# Altium PCB LM2596-12V.PcbDoc
Units mm, origin at the board's own origin, x right, y up, seen from the top; angles counter-clockwise.
Board outline 61.2 x 24 mm, 2 copper layers (Top Layer, Bottom Layer); 12 components, 5 nets, 40 pads, 39 vias.
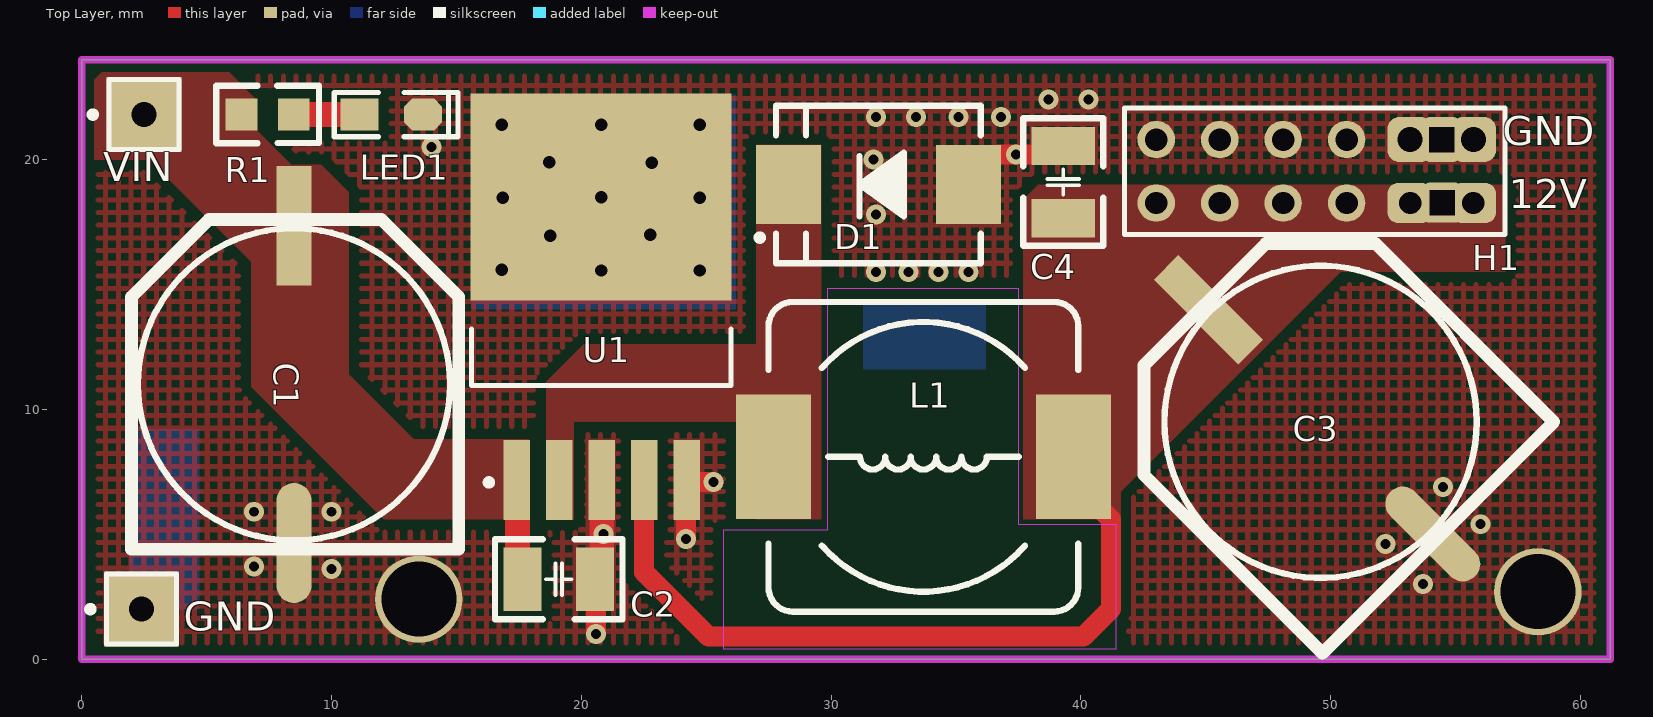
[diagram p0: Top Layer view]
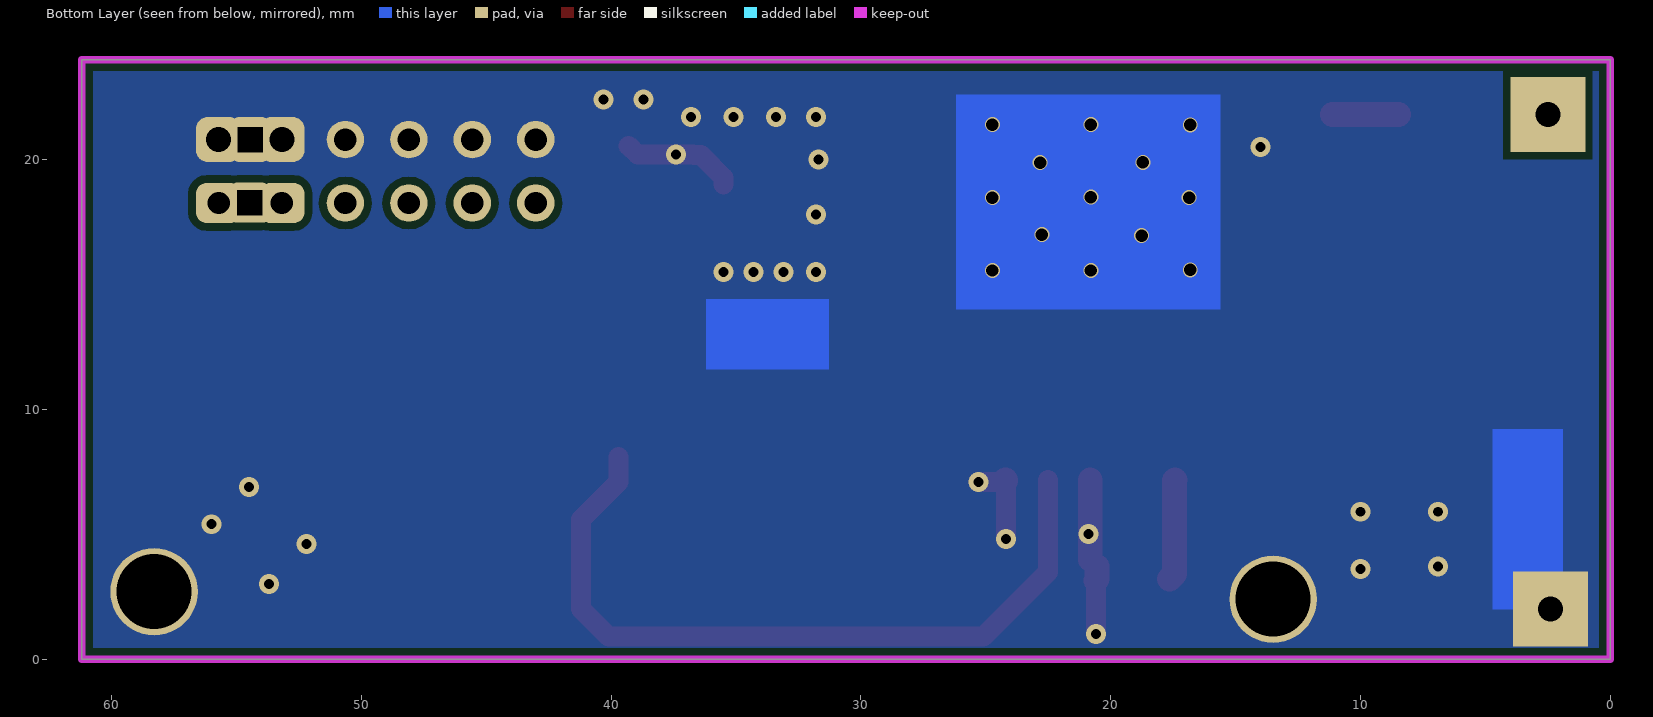
[diagram p1: Bottom Layer view, seen from below]
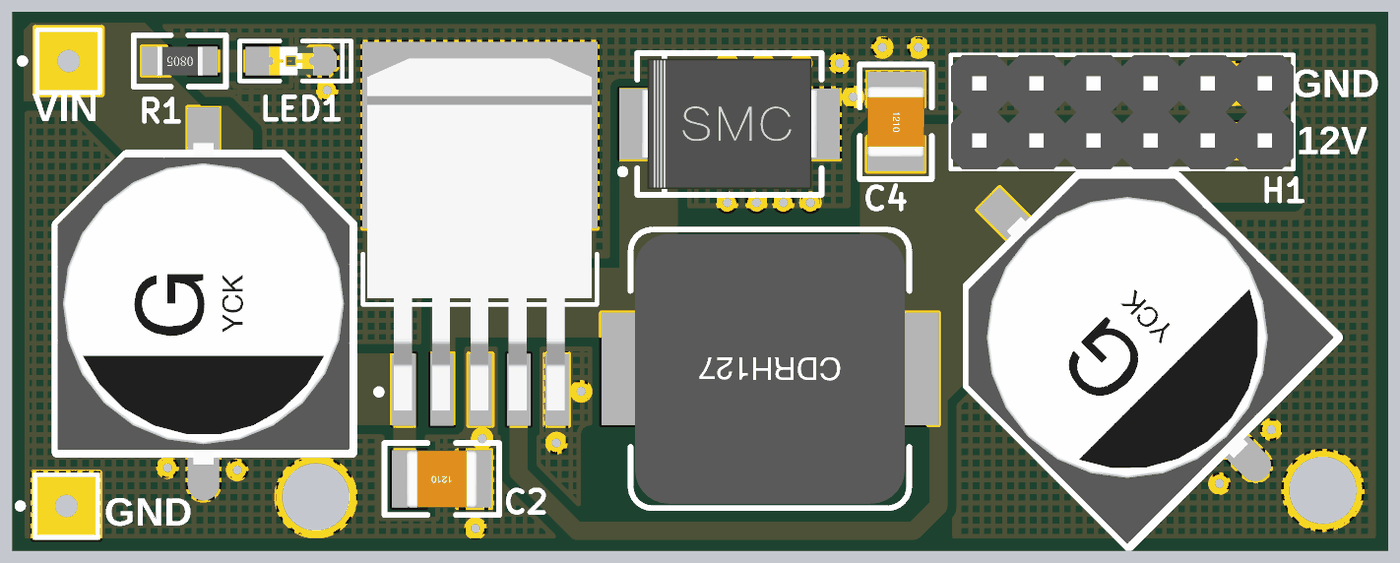
[diagram p2: 3D render of the assembled board from above, using the file's embedded part models]

## Layer stack, top to bottom
Top Solder: solder mask 0.0102, Solder Resist, Dk 3.5
Top Layer: signal copper 0.0356
Dielectric 1: dielectric 0.32, FR-4, Dk 4.8
Bottom Layer: signal copper 0.0356
Bottom Solder: solder mask 0.0102, Solder Resist, Dk 3.5

## Board outline
0,0 61.2,0 61.2,24 0,24

## Design rules (kind name [scope] priority, off if disabled: settings)
Clearance Clearance_1 [InNet('GND') And OnLayer('Bottom Layer')] p1: gap=0.3 ignorepadtopadclearanceinfootprint=TRUE
Clearance [InNet('GND') And OnLayer('Top Layer')] p2: gap=0.4 ignorepadtopadclearanceinfootprint=TRUE
PlaneConnect [All] p1: planeconnectstyle=Relief reliefexpansion=0.508 reliefentries=4 reliefconductorwidth=0.254 reliefairgap=0.3
PolygonConnect [All] p1: connectstyle=Direct reliefconductorwidth=0.3 reliefentries=4 polygonreliefangle="90 Angle" airgapwidth=0.3
RoutingVias [All] p1: holewidth=0.711 width=1.27 viastyle="Through Hole" minholewidth=0.4 minwidth=0.5 maxholewidth=1 maxwidth=2
SolderMaskExpansion [All] p1: expansion=0.102 istentingtop=FALSE
Width [All] p1: maxlimit=3 minlimit=0.3 preferedwidth=0.8
29 further rules are at their usual default settings.

## Components (designator, comment, footprint, x,y, rotation, side; value= is the part's Value field where it differs from the comment)
C1 "470uF" "CM G(12.5*13.5)" 8.5,11 r90 top
C2 "100nF" "C 1210_L" 19.1,3.2 r180 top
C3 "470uF" "CM G(12.5*13.5)" 49.6,9.5 r135 top
C4 "100nF" "C 1210_L" 39.3,19.1 r270 top
D1 "SS56 SMC" SMC 31.9,19 r180 top
GND "HDR-M-2.54_1x1" PIN1 2.4,2 r90 top (schematic designator J2)
H1 "PZ254V-12-12P" HDR2X6 55.72,20.8 r180 top
L1 "68uH" CDRH127 33.7,8.1 r180 top
LED1 "Red" "LED 0805R" 12.4,21.8 r0 top
R1 "2K" R0805 8.49,21.805 r180 top
U1 "LM2596S-12/TR_C462059" TO263-5 20.419,12.383 r270 top
VIN "HDR-M-2.54_1x1" PIN1 2.5,21.8 r90 top (schematic designator J1)

## Footprints (in the part's own frame and the unit in brackets; to place one, negate y for a bottom-side part, rotate by r counter-clockwise, add the part's x,y. Pads: shape width x height; smd on the part's side, far side on the other; paste and mask are expansions set on the pad)
"C 1210_L" [mm] "无极性贴片电容"
  rect 1.524x2.54 smd: 1(-1.45,0) 2(1.45,0)
  silkscreen extent -2.55,-1.6 2.55,1.6, body extent -1.6,-1.29 1.6,1.29, height 1.54
CDRH127 [mm] "12*12*8mm（长宽高）"
  rect 3x5 smd: 1(-6,0) 2(6,0)
  silkscreen extent -6.2,-6.2 6.2,6.2, body extent -6,-6 6,6, height 7.8
"CM G(12.5*13.5)" [mm] "贴片电解电容，直径12.5mm，高13.5mm"
  rect 4.8x1.4 smd: 1(6.35,0)
  oval 4.8x1.4 smd: 2(-6.35,0)
  silkscreen extent -6.6,-6.6 6.6,6.5, body extent -7.15,-6.5 7.15,6.5, height 13.5
HDR2X6 [mm] "Connector; Header; 6x2 Position"
  rrect50% 1.8x1.8 hole 1: 1(0,0) 3(2.54,0)
  rrect50% 1.8x1.6 hole 0.9: 2(0,2.54) 4(2.54,2.54)
  round 1.5 hole 0.9: 5(5.08,0) 6(5.08,2.54) 7(7.62,0) 8(7.62,2.54) 9(10.16,0) 10(10.16,2.54) 11(12.7,0) 12(12.7,2.54)
  silkscreen extent -1.27,-1.27 13.97,3.81, body extent -1.27,-1.27 13.97,3.81, height 8.54
"LED 0805R" [mil] "红色0805LED                                       淘宝ID:黄晶宝石"
  rect 60x50 smd: 1(-50,0)
  oct 60x50 smd: 2(50,0)
  silkscreen extent -90,-35 105,35, body extent -39,-25 39,25, height 32
PIN1 [mm] "Connector; Plug"
  rect 3x3 hole 1: 1(0,0)
  silkscreen extent -1.4,-1.4 1.4,2.17
R0805 [mm] "1/8W"
  rect 1.27x1.27 smd: 1(0,0) 2(2.09,0.005)
  silkscreen extent -1.01,-1.14 3.1,1.15, body extent 0.04,-0.62 2.04,0.64, height 0.55
SMC [mm] "7.1x5.9*2.3mm（长宽高，不包括引脚）"
  rect 2.6x3.15 smd: 1(-3.6,0) 2(3.6,0)
  silkscreen extent -4.1,-3.15 4.87,3.15, body extent -3.95,-2.9 3.95,2.9, height 2.45
TO263-5 [mm]
  rect 3.2x1.05 smd: 1(5.207,-2.997) 2(5.207,-1.297) 3(5.207,0.403) 4(5.207,2.103) 5(5.207,3.803)
  rect 8.3x10.45 smd: 6(-6.117,0.381)
  silkscreen extent -0.83,-4.82 5.43,5.58, body extent -9.54,-4.64 6.13,5.36, height 4.78

## Part data
C1 C3: BOM_Manufacturer=LELON, BOM_Manufacturer Part=VEJ471M1HTR-1316, BOM_Supplier=LCSC, BOM_Supplier Part=C108926, Contributor=LCSC, nameAlias=Capacitance, spicePre=C, spiceSymbolName=VEJ471M1HTR-1316
C2 C4: BOM_Manufacturer=HEC, BOM_Manufacturer Part=C1210X104K251T, BOM_Supplier=LCSC, BOM_Supplier Part=C106103, nameAlias=Capacitance, spicePre=C, spiceSymbolName=C1210X104K251T
D1: BOM_LCSC Assembly=Yes, BOM_Manufacturer=MDD, BOM_Manufacturer Part="SS56 SMC", BOM_Supplier=LCSC, BOM_Supplier Part=C24138, image=//image.lceda.cn/szlcsc/C24138.jpg, SMT Type=Extend, spicePre=D, spiceSymbolName="SS56 SMC"
H1: BOM_JLCPCB Part Class="Extended Part", BOM_Manufacturer=XFCN, BOM_Manufacturer Part=PZ254V-12-12P, BOM_Supplier=LCSC, BOM_Supplier Part=C492423, Contributor=LCSC, spicePre=H, spiceSymbolName=PZ254V-12-12P
L1: BOM_Manufacturer=YJYCOIN, BOM_Supplier=LCSC, BOM_Supplier Part=C497902, Contributor=LCSC, nameAlias=Inductance, spicePre=L, spiceSymbolName=MS1360-680M
LED1: library part 17-21SURC/S530-A3/TR8, BOM_JLCPCB Part Class="Extended Part", BOM_Manufacturer=EVERLIGHT, BOM_Manufacturer Part=17-21SURC/S530-A3/TR8, BOM_Supplier=LCSC, BOM_Supplier Part=C72037, spicePre=L, spiceSymbolName=17-21SURC/S530-A3/TR8
R1: BOM_JLCPCB Part Class="Extended Part", BOM_Manufacturer=UniOhm, BOM_Manufacturer Part=0805W8J0202T5E, BOM_Supplier=LCSC, BOM_Supplier Part=C1359, nameAlias="Resistance (Ohms)", spicePre=R, spiceSymbolName=0805W8J0202T5E
U1: BOM_Manufacturer="HGC(Huaguan Semicon)", BOM_Manufacturer Part=LM2596S-12/TR, BOM_Supplier=LCSC, BOM_Supplier Part=C462059, Contributor=LCSC, spicePre=U, spiceSymbolName=LM2596S-12/TR_C462059
GND VIN: BOM_Supplier=LCSC, BOM_Supplier Part=C81276, Contributor=LCEDA_Lib, spicePre=J, spiceSymbolName=HDR-M-2.54_1x1

## Free pads (board coordinates)
  round 3.5 hole 3: 8(13.5,2.4) 8(58.3,2.7)
  rrect50% 1.8x1.8 hole 1 square: ""(54.442,20.801)
  rrect50% 1.8x1.6 hole 1 square: ""(54.475,18.275)

## Via types
v1: diameter 0.8, hole 0.4, Top Layer to Bottom Layer, 26 vias
v2: diameter 0.6, hole 0.5, Top Layer to Bottom Layer, 13 vias

## Nets (pads, with @x,y where several pads share a name; then routed paths per layer and width w, separated by ;. In a path a pad name is that pad's centre, name@x,y a point inside that pad or via, vN(x,y) a via of type N, cw(c..) or ccw(c..) an arc to the next point about the centre after c; other vN are vias at no path point)
FB/12V: C3.1 C4.2 H1.2 H1.4 H1.6 H1.8 H1.10 H1.12 L1.1 pad.@54.475,18.275 U1.4 | length 30.6
  Top Layer w0.8: U1.4 22.522,3.478 25.1,0.9 40.1,0.9 41.2,2 41.2,5.6 39.7,7.1 L1.1
GND: C1.2 C2.1 C3.2 C4.1 D1.1 GND.1 H1.1 H1.3 H1.5 H1.7 H1.9 H1.11 LED1.2 pad.8 pad.@54.442,20.801 U1.3 U1.5 U1.6 | length 14.1
  Top Layer w0.8: v1(20.6,1) C2.1@20.6,3.15 ; v1(24.2,4.8) 24.2,7.154 U1.5 ; U1.5@24.247,7.1 v1(25.3,7.1) ; D1.1 35.5,19.275 36.4,20.175 36.675,20.175 36.7,20.2 38.95,20.2 C4.1
  Top Layer w1: C2.1@20.55,3.708 C2.1 C2.1@20.6,3.15 ; C2.1@20.822,3.98 U1.3 ; U1.5 24.222,7.125 U1.5@24.247,7.1
  other v1: 53.7,3 10,3.6 6.9,3.7 52.2,4.6 20.9,5 56,5.4 6.9,5.9 10,5.9 54.5,6.9 31.8,15.5 33.1,15.5 34.3,15.5 35.5,15.5 31.8,17.8 31.7,20 37.4,20.2 14,20.5 31.8,21.7 33.4,21.7 35.1,21.7 36.8,21.7 38.7,22.4 40.3,22.4
  other v2: 20.8,15.558 24.737,15.558 16.819,15.583 18.768,16.955 22.763,16.995 16.863,18.479 20.8,18.5 24.737,18.479 18.719,19.883 22.832,19.876 16.819,21.383 20.8,21.4 24.737,21.4
NetLED1_1: LED1.1 R1.1 | length 2.6
  Top Layer w1: R1.1 8.493,21.803 11.127,21.803 LED1.1
VIN: C1.1 C2.2 R1.2 U1.1 VIN.1 | length 4.1
  Top Layer w1: U1.1 17.447,7.151 17.447,3.403 C2.2
Vout: D1.2 L1.2 U1.2

## Polygon pours and split planes (outlines as drawn)
FB/12V on Top Layer "tgt" (solid, remove dead copper, pour order 19): 41.6,5.6 37.7,5.6 37.7,18.4 38.3,19 41.6,19
GND on Top Layer "GND_L01_P021" (hatched 90Degree grid 0.508 track 0.203, remove dead copper, pour order 21): 0,24 0,0 61.2,0 61.2,24
VIN on Top Layer "VIN_L01_P020" (solid, remove dead copper, pour order 20): 10.7,17.5 10.7,18.7 9.6,19.8 8.4,19.8 7,21.2 7,22.4 5.9,23.5 0.8,23.5 0.5,23.2 0.5,20 2.7,20 6.8,15.9 6.8,10.9 12.1,5.6 17.9,5.6 17.9,8.8 13.3,8.8 10.7,11.4
FB/12V on Top Layer "FB/12V_L01_P017" (solid, remove dead copper, pour order 17): 41.3,19 57,19 57,15.5 50.4,15.5 41.3,6.4
Vout on Top Layer "Vout" (solid, remove dead copper, pour order 9): 18.6,5.6 18.6,11.1 20.1,12.6 27,12.6 27,20.6 29.6,20.6 29.6,5.6 27,5.6 27,9.5 19.7,9.5 19.7,5.6
GND on Bottom Layer "GND_L02_P008" (solid, remove dead copper, pour order 8): 0,0 61.2,0 61.2,24 0,24

## Keep-outs
Top Layer:
  region: 37.5,5.4 41.4,5.4 41.4,0.4 25.7,0.4 25.7,5.178 29.874,5.18 29.874,14.85 37.5,14.85
Keep-Out Layer:
  the board outline again, w0.3

## Other copper
Bottom Layer:
  rectangle net GND: 15.6,14 26.2,22.6
  region net GND: 1.9,2 4.7,2 4.7,9.2 1.9,9.2 1.9,4.4
  region net GND: 31.3,14.4 31.3,14.2 31.3,11.6 36.2,11.6 36.2,14.4 31.4,14.4

## Text inside footprints (layer, text, board x,y; h text height)
H1: Top Overlay "GND" at 56.9,20.2 h2; Top Overlay "12V" at 57.14,17.66 h2